# EAGLE board ciabatta (EAGLE 4.16)
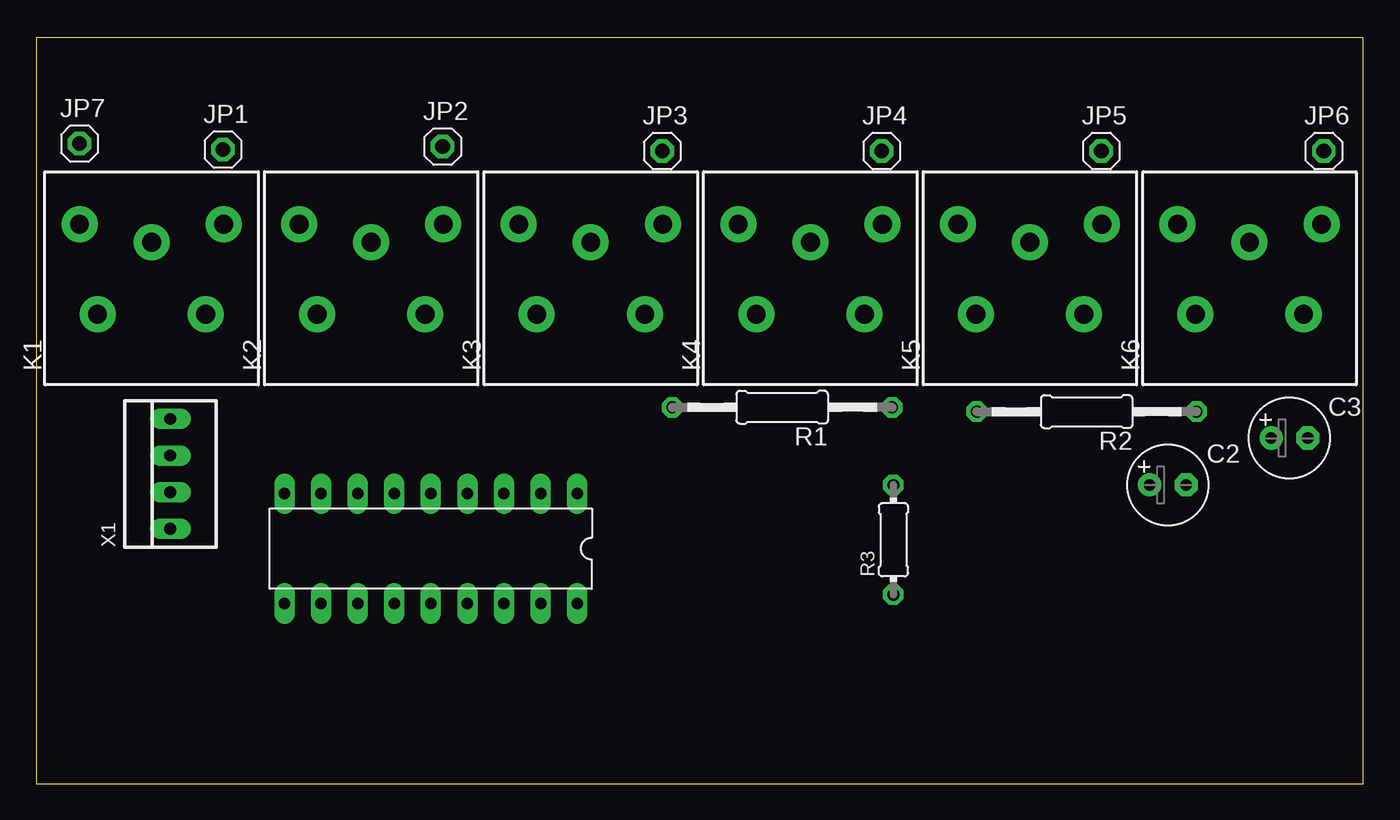
[diagram p0: board, top side]
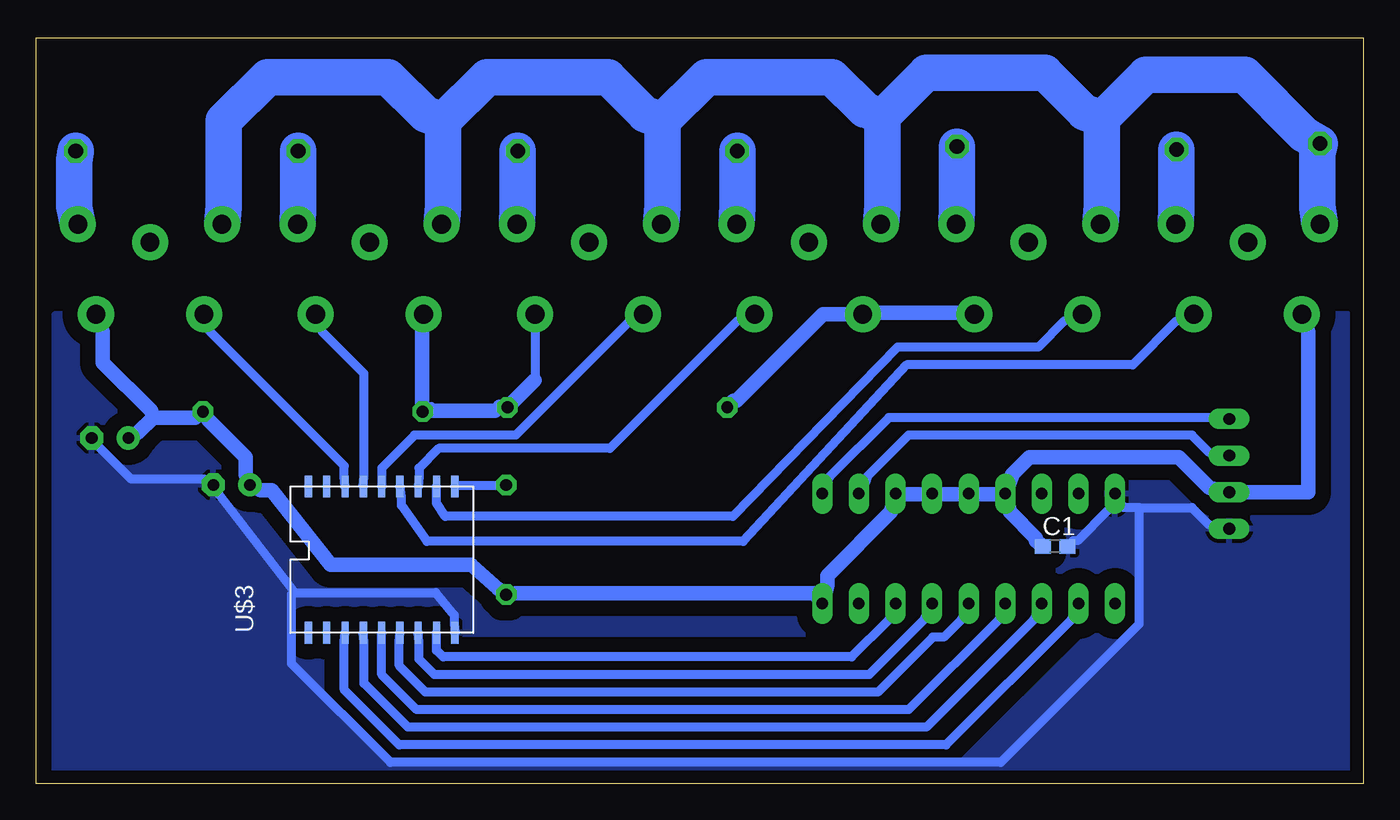
[diagram p1: board, bottom side, seen from below]

Size 92.13 x 51.77 mm. Coordinates in mm from the lower left corner, seen from the top.
Outline: 0,0 92.11,0 92.13,51.77 0,51.77 0,0
Copper layers (1*16): Top 0.035mm / dielectric 1.5mm / Bottom 0.035mm
Design rules "mio2": minimum track width 24mil, minimum drill 12mil, track to track 42mil, track to pad 42mil, pad to pad 24mil, via to via 24mil, smd to smd 24mil, copper to edge 36mil, drill to drill 8mil, minimum pad ring 12mil, minimum via ring 12mil, stop-mask expansion 4mil, vias tented up to drill 0mil, thermal gap 10mil
Net classes: 0 signal: width 0.508 mm; 1 220: width 2.54 mm; 2 signal2: width 0.508 mm; 3 vcc: width 1.016 mm; 4 smd: width 0.203 mm
bRestrict: area 0.7,33.5 to 91.8,36.6

## Footprints (pad centres in the part's own frame; a part is rotated, then mirrored left to right if it is on the bottom)
C0603 = smd 1.1 x 1: 1 -0.85,0; 2 0.85,0
E2,5-6 = drill 0.813 pad 1.6 round: + -1.27,0 | drill 0.813 pad 1.6 octagon: - 1.27,0
1X01 = drill 1.016 octagon: 1 0,0
PB = drill 1.3 pad 2.5 round: 11 3.81,-5; 12 2.56,0; 14 3.81,5; A1 -2.44,-3.75; A2 -2.44,3.75
0207/15 = drill 0.813 octagon: 1 -7.62,0; 2 7.62,0
0204/7 = drill 0.813 octagon: 1 -3.81,0; 2 3.81,0
MCP23008_DHT = drill 0.8 long: P$1 0,0; P$2 2.54,0; P$3 5.08,0; P$4 7.62,0; P$5 10.16,0; P$6 12.7,0; P$7 15.24,0; P$8 17.78,0; P$9 20.32,0; P$10 20.32,7.62; P$11 17.78,7.62; P$12 15.24,7.62; P$13 12.7,7.62; P$14 10.16,7.62; P$15 7.62,7.62; P$16 5.08,7.62; P$17 2.54,7.62; P$18 0,7.62
ULN2803 = smd 0.5 x 1.5: 1 0,1.27; 2 1.27,1.27; 3 2.54,1.27; 4 3.81,1.27; 5 5.08,1.27; 6 6.35,1.27; 7 7.62,1.27; 8 8.89,1.27; 9 10.16,1.27; 10 10.16,11.43; 11 8.89,11.43; 12 7.62,11.43; 13 6.35,11.43; 14 5.08,11.43; 15 3.81,11.43; 16 2.54,11.43; 17 1.27,11.43; 18 0,11.43
22-23-2041 = drill 0.813 long: 1 -3.81,0; 2 -1.27,0; 3 1.27,0; 4 3.81,0

## Placement (x,y rotation side)
C1  [C0603]  21.41,16.47 0 bottom
C2  [E2,5-6]  78.56,20.74 0 top
C3  [E2,5-6]  86.99,23.99 0 top
JP1  [1X01]  12.97,44.01 0 top
JP2  [1X01]  28.21,44.21 0 top
JP3  [1X01]  43.45,43.9 0 top
JP4  [1X01]  58.69,43.9 0 top
JP5  [1X01]  73.93,43.9 0 top
JP6  [1X01]  89.38,43.9 0 top
JP7  [1X01]  3.02,44.41 0 top
K1  PB114006  [PB]  8.02,35.01 90 top
K2  PB114006  [PB]  23.26,35.01 90 top
K3  PB114006  [PB]  38.5,35.01 90 top
K4  PB114006  [PB]  53.74,35.01 90 top
K5  PB114006  [PB]  68.98,35.01 90 top
K6  PB114006  [PB]  84.22,35.01 90 top
R1  0  [0207/15]  51.79,26.12 180 top
R2  0  [0207/15]  72.92,25.82 180 top
R3  [0204/7]  59.51,16.93 90 top
U$1  MCP23008_DHT  [MCP23008_DHT]  37.56,20.13 180 top
U$2  [DINA4_P]  -33.56,-66.59 0 top  (outside the outline)
U$3  ULN2803  [ULN2803]  73.22,9.21 0 bottom
X1  22-23-2041  [22-23-2041]  9.32,21.5 90 top

## Library data of the parts
C1-C3 R1-R3 = rcl
JP1-JP7 = pinhead
K1-K6 = relay
U$1 U$3 = aggiunte
U$2 = frames
X1 = con-molex

## Nets
+5V [vcc]: C1.1 C2.+ C3.+ K1.A2 K6.A1 R2.1 R3.1 U$1.P$3 U$1.P$4 U$1.P$5 U$1.P$6 U$1.P$18 X1.2
CH1: K2.A1 K3.A2 R1.2
CH2: K2.A2 U$3.11
CH5: K5.A1 U$3.15
CH6: K6.A2 U$3.16
GND: C1.2 C2.- C3.- U$1.P$9 U$3.9 X1.1
N$1: U$1.P$2 X1.3
N$2: U$1.P$1 X1.4
N$3: U$1.P$11 U$3.3
N$4: U$1.P$12 U$3.4
N$5 [220]: JP7.1 K1.14 K2.14 K3.14 K4.14 K5.14 K6.14
N$6: U$1.P$13 U$3.5
N$7 [220]: JP6.1 K6.11
N$8 [220]: JP5.1 K5.11
N$9: U$1.P$14 U$3.6
N$10 [220]: JP4.1 K4.11
N$11: U$1.P$15 U$3.7
N$12 [220]: JP3.1 K3.11
N$13: U$1.P$16 U$3.8
N$14 [220]: JP2.1 K2.11
N$15: R3.2 U$3.10
N$16 [220]: JP1.1 K1.11
N$22: K4.A1 K5.A2 R1.1 R2.2
N$25: K4.A2 U$3.14
N$26: K1.A1 U$3.13
N$27: K3.A1 U$3.12

## Tracks (layer width: path | path; a pad name or v marks a point on that pad's centre or on a via)
+5V
  Bottom 1.016: K1.A2 3.83,31.36 3.83,20.23 X1.2 10.69,20.54 12.82,22.67 23.19,22.67 24.4,21.45 24.4,21.3 U$1.P$6 | U$1.P$6 25.47,20.08 26.84,20.08 U$1.P$5 28.06,20.08 29.28,20.08 U$1.P$4 30.5,20.08 31.87,20.08 U$1.P$3 32.79,18.86 37.21,14.44 37.21,13.83 U$1.P$18 38.12,13.22 58.85,13.22 R3.1 60.07,13.53 61.95,15.2 71.7,15.2 75.76,20.38 76.53,20.38 C2.+ 77.59,21.45 77.59,22.67 80.18,25.26 R2.1 81.1,25.41 83.99,25.41 | 83.99,25.41 85.06,24.35 C3.+ | K6.A1 87.5,31.36 87.5,29.22 84.15,25.87 83.99,25.41 | C1.1 22.73,16.88 22.73,17.03 24.56,18.86 U$1.P$6
CH1
  Bottom 1.016: K2.A1 27.11,32.68 34.65,32.68 K3.A2 37.51,32.57 43.51,26.58 43.71,26.58 R1.2 44.32,25.97
CH2
  Bottom 0.61: U$3.11 64.33,19.47 63.72,18.55 43.76,18.55 32.33,30.29 22.58,30.29 20.75,32.12 K2.A2
CH5
  Bottom 0.61: U$3.15 69.36,21.3 69.36,28.46 72.26,31.36 K5.A1
CH6
  Bottom 0.61: U$3.16 70.73,21.3 70.73,22.06 80.03,31.36 K6.A2
GND
  Bottom 0.61: 15.57,19.16 11.91,19.16 10.69,17.95 X1.1 | 15.57,19.16 16.63,19.16 U$1.P$9 17.7,19.01 19.83,16.88 20.14,16.88 C1.2 | 74.14,13.27 64.38,13.27 63.11,11.7 63.11,11.09 U$3.9 | 74.14,13.27 79.42,20.08 C2.- 80.49,21.15 85.52,21.15 87.8,23.43 C3.- | 15.57,19.16 15.57,11.09 25.17,1.49 67.53,1.49 74.39,8.34 74.39,13.12 74.14,13.27
  pour Bottom: 1.04,32.58 90.85,32.58 90.85,0.77 0.93,0.77
N$1
  Bottom 0.61: U$1.P$2 34.46,21.15 34.46,21.3 31.57,24.19 11.91,24.19 10.69,22.97 X1.3
N$2
  Bottom 0.61: U$1.P$1 37.05,21.3 32.94,25.41 10.69,25.41 X1.4
N$3
  Bottom 0.61: U$3.3 70.73,9.87 70.73,6.52 66.92,2.71 28.98,2.71 20.29,11.39 U$1.P$11
N$4
  Bottom 0.406: U$3.4 69.41,10.73
  Bottom 0.61: U$3.4 69.36,9.87 69.36,6.97 66.31,3.92 30.35,3.92 22.88,11.39 U$1.P$12
N$5
  Bottom 2.54: K1.14 3.22,40.04 3.22,43.7 JP7.1 4.14,45.07 8.25,49.19 15.11,49.19 18.16,46.14 | 18.16,46.14 18.16,40.04 K2.14 | 33.4,46.29 33.4,40.04 K3.14 | 33.4,46.29 30.35,49.34 22.12,49.34 19.38,46.6 18.16,46.14 | 48.64,45.99 48.64,40.04 K4.14 | 48.64,45.99 45.59,49.04 36.9,49.04 34.62,46.75 33.4,46.29 | 63.88,45.99 63.88,40.04 K5.14 | 63.88,45.99 60.83,49.04 52.45,49.04 49.86,46.44 48.64,45.99 | K6.14 79.12,40.04 79.12,45.99 76.07,49.04 67.69,49.04 65.1,46.44 63.88,45.99
N$6
  Bottom 0.61: U$3.5 68.14,7.58 65.7,5.14 31.57,5.14 25.32,11.39 U$1.P$13
N$7
  Bottom 2.54: JP6.1 89.48,43.24 89.48,40.04 K6.11
N$8
  Bottom 2.54: JP5.1 73.93,40.04 K5.11
N$9
  Bottom 0.406: U$3.6 66.87,10.53
  Bottom 0.61: U$3.6 66.92,9.87 66.92,8.19 65.1,6.36 33.7,6.36 29.89,10.17 29.13,10.17 27.91,11.39 U$1.P$14
N$10
  Bottom 2.54: K4.11 58.69,40.04 JP4.1
N$11
  Bottom 0.406: U$1.P$15 29.99,12.51 | 65.55,10.63 65.55,10.48 U$3.7
  Bottom 0.61: U$3.7 65.55,9.87 65.55,8.65 64.49,7.58 34.31,7.58 30.5,11.39 U$1.P$15
N$12
  Bottom 2.54: K3.11 43.45,40.04 JP3.1
N$13
  Bottom 0.61: U$3.8 64.33,9.26 63.88,8.8 35.53,8.8 32.94,11.39 U$1.P$16
N$14
  Bottom 2.54: JP2.1 28.21,40.04 K2.11
N$15
  Bottom 0.61: U$3.10 62.96,20.69 60.07,20.69 R3.2
N$16
  Bottom 2.54: JP1.1 12.97,40.04 K1.11
N$22
  Bottom 0.61: R1.1 59.96,26.18 | R2.2 64.69,26.18 | K4.A1 57.48,31.36 57.48,28.46 57.53,28 | 65.35,31.36 65.4,31.36 K5.A2
  Bottom 1.016: K4.A1 57.53,32.54 | R1.1 57.53,28 | 59.96,26.18 60.27,25.87 65.25,25.87 R2.2 65.35,25.87 65.35,31.36 65.35,32.46
N$25
  Bottom 0.61: U$3.14 68.14,21.91 65.86,24.19 58.85,24.19 51.07,31.97 K4.A2
N$26
  Bottom 0.61: U$3.13 66.77,19.93 66.77,19.32 64.99,16.83 43.05,16.83 31.72,29.07 16.02,29.07 12.97,32.12 K1.A1
N$27
  Bottom 0.61: U$3.12 65.55,21.3 65.55,21.91 64.18,23.28 52.29,23.28 43.45,32.12 K3.A1